# EAGLE board blue_LEDs (EAGLE 9.6.2)
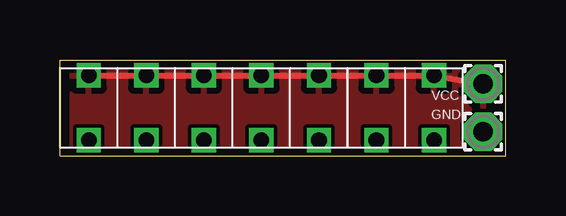
[diagram p0: board, top side]
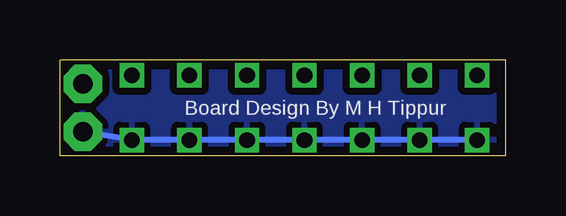
[diagram p1: board, bottom side, seen from below]

Size 18.6 x 4 mm. Coordinates in mm from the lower left corner, seen from the top.
Outline: 0,4 18.6,4 18.6,0 0,0 0,4
Copper layers (1*16): Top 0.035559375mm / dielectric 1.6mm / Bottom 0.035559375mm
Design rules "oshpark-2layer": minimum track width 6mil, minimum drill 10mil, track to track 6mil, track to pad 6mil, pad to pad 6mil, via to via 6mil, smd to smd 6mil, copper to edge 15mil, drill to drill 6mil, minimum pad ring 5mil, minimum via ring 5mil, stop-mask expansion 2.5mil, vias tented up to drill 0mil, thermal gap 10mil

## Footprints (pad centres in the part's own frame; a part is rotated, then mirrored left to right if it is on the bottom)
1,6/0,8 = drill 0.813 pad 1.6 octagon: 1 0,0
THROUGH_HOLE_LENSED_LED = drill 0.65 pad 1.016 square: GND 0,-1.35; VCC 0,1.35

## Placement (x,y rotation side)
GND  WIREPAD1,6/0,8  [1,6/0,8]  17.65,1 0 top
U$2  THROUGH_HOLE_LENSED_LED  [THROUGH_HOLE_LENSED_LED]  1.2,2 0 top
U$3  THROUGH_HOLE_LENSED_LED  [THROUGH_HOLE_LENSED_LED]  3.6,2 0 top
U$4  THROUGH_HOLE_LENSED_LED  [THROUGH_HOLE_LENSED_LED]  6,2 0 top
U$5  THROUGH_HOLE_LENSED_LED  [THROUGH_HOLE_LENSED_LED]  8.4,2 0 top
U$6  THROUGH_HOLE_LENSED_LED  [THROUGH_HOLE_LENSED_LED]  10.8,2 0 top
U$7  THROUGH_HOLE_LENSED_LED  [THROUGH_HOLE_LENSED_LED]  13.2,2 0 top
U$8  THROUGH_HOLE_LENSED_LED  [THROUGH_HOLE_LENSED_LED]  15.6,2 0 top
VCC  WIREPAD1,6/0,8  [1,6/0,8]  17.65,3 0 top

## Library data of the parts
GND VCC = wirepad
U$2-U$8 = ThroughHole_LensedLED

## Nets
N$2: U$2.VCC U$3.VCC U$4.VCC U$5.VCC U$6.VCC U$7.VCC U$8.VCC VCC.1
N$3: GND.1 U$2.GND U$3.GND U$4.GND U$5.GND U$6.GND U$7.GND U$8.GND

## Tracks (layer width: path | path; a pad name or v marks a point on that pad's centre or on a via)
N$2
  Top 0.254: U$2.VCC U$3.VCC U$4.VCC U$5.VCC U$6.VCC U$7.VCC U$8.VCC VCC.1
  pour Top: 0,4 18.6,4 18.6,0 0,0
N$3
  Bottom 0.254: U$2.GND U$3.GND U$4.GND U$5.GND U$6.GND U$7.GND U$8.GND GND.1
  pour Bottom (isolate 0.305): 0,4 18.6,4 18.6,0 0,0

## Text on the board
bNames: Board Design By M H Tippur